# Altium PCB analog_multiplierV5.PcbDoc
Units mm, origin at the board's own origin, x right, y up, seen from the top; angles counter-clockwise.
Board outline 60 x 30 mm, 2 copper layers (F.Cu, B.Cu); 94 components, 84 nets, 256 pads, 22 vias.
Unrouted connection lines stored in the file: 32.
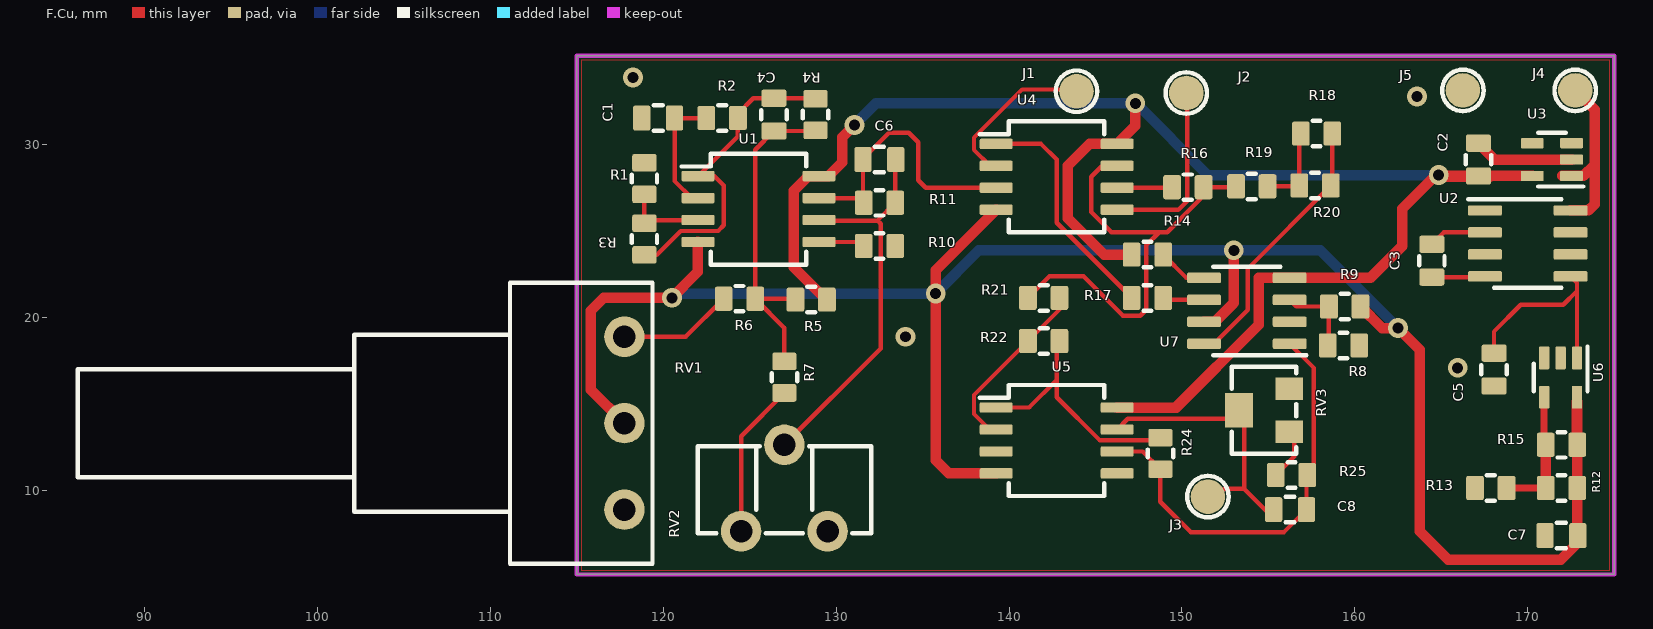
[diagram p0: F.Cu view]
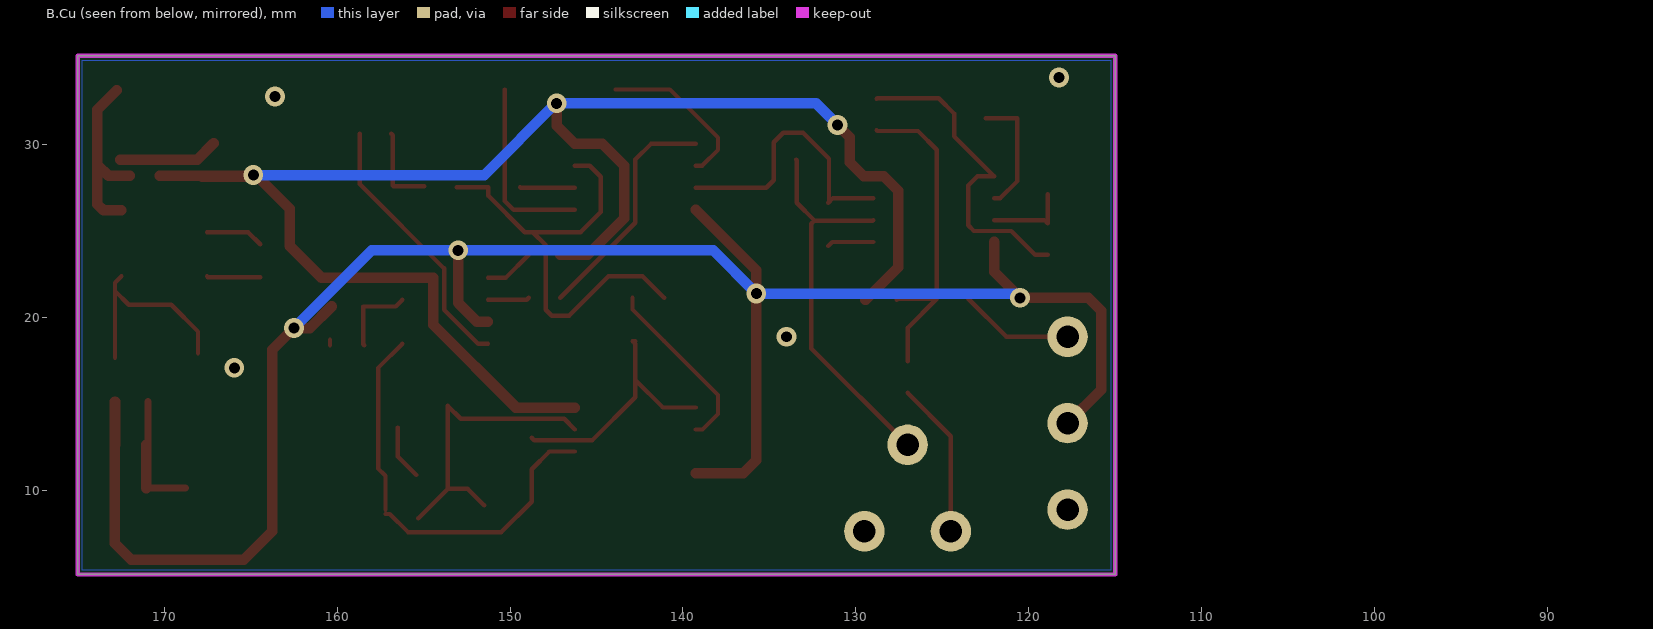
[diagram p1: B.Cu view, seen from below]

## Layer stack, top to bottom
F.Mask: solder mask 0.0102, Solder Resist, Dk 3.5
F.Cu: signal copper 0.0356
Dielectric 1: dielectric 0.32, FR-4, Dk 4.8
B.Cu: signal copper 0.0356
B.Mask: solder mask 0.0102, Solder Resist, Dk 3.5

## Board outline
175,5.15 115,5.15 115,35.15 175,35.15 175,5.15

## Design rules (kind name [scope] priority, off if disabled: settings)
Clearance "Clearence 0,5_Polygon" [InNamedPolygon('F.Cu-GND') OR InNamedPolygon('B.Cu-GND') OR InNamedPolygon('F.Cu-GND-1') OR InNamedPolygon('B.Cu-GND-1')] p1: gap=0.5 ignorepadtopadclearanceinfootprint=FALSE
MinimumSolderMaskSliver [All] p1: minsoldermaskwidth=0
PolygonConnect Polygon_B.Cu-GND-1_ConnectDirect [IsNamedPolygon('B.Cu-GND-1') vs IsVia] p1: connectstyle=Direct reliefconductorwidth=0.254 reliefentries=4 polygonreliefangle="90 Angle" airgapwidth=0.254
PolygonConnect Polygon_B.Cu-GND-1_ConnectRelief_2 [IsNamedPolygon('B.Cu-GND-1') vs (IsThruPin or IsSMTPin) and (PadShape_AllLayers = 'Round')] p2: connectstyle=Relief reliefconductorwidth=0.5 reliefentries=4 polygonreliefangle="45 Angle" airgapwidth=0.5
PolygonConnect Polygon_B.Cu-GND-1_ConnectRelief_1 [IsNamedPolygon('B.Cu-GND-1') vs (IsThruPin or IsSMTPin) and (PadShape_AllLayers <> 'Round')] p3: connectstyle=Relief reliefconductorwidth=0.5 reliefentries=4 polygonreliefangle="90 Angle" airgapwidth=0.5
PolygonConnect Polygon_F.Cu-GND-1_ConnectDirect_1 [IsNamedPolygon('F.Cu-GND-1') vs IsVia] p4: connectstyle=Direct reliefconductorwidth=0.254 reliefentries=4 polygonreliefangle="90 Angle" airgapwidth=0.254
PolygonConnect Polygon_F.Cu-GND-1_ConnectRelief_2 [IsNamedPolygon('F.Cu-GND-1') vs (IsThruPin or IsSMTPin) and (PadShape_AllLayers = 'Round')] p5: connectstyle=Relief reliefconductorwidth=0.5 reliefentries=4 polygonreliefangle="45 Angle" airgapwidth=0.5
PolygonConnect Polygon_F.Cu-GND-1_ConnectRelief_1 [IsNamedPolygon('F.Cu-GND-1') vs (IsThruPin or IsSMTPin) and (PadShape_AllLayers <> 'Round')] p6: connectstyle=Relief reliefconductorwidth=0.5 reliefentries=4 polygonreliefangle="90 Angle" airgapwidth=0.5
PolygonConnect Polygon_B.Cu-GND_ConnectDirect_1 [IsNamedPolygon('B.Cu-GND') vs IsVia] p7: connectstyle=Direct reliefconductorwidth=0.254 reliefentries=4 polygonreliefangle="90 Angle" airgapwidth=0.254
PolygonConnect Polygon_B.Cu-GND_ConnectRelief_2 [IsNamedPolygon('B.Cu-GND') vs (IsThruPin or IsSMTPin) and (PadShape_AllLayers = 'Round')] p8: connectstyle=Relief reliefconductorwidth=0.5 reliefentries=4 polygonreliefangle="45 Angle" airgapwidth=0.5
PolygonConnect Polygon_B.Cu-GND_ConnectRelief_1 [IsNamedPolygon('B.Cu-GND') vs (IsThruPin or IsSMTPin) and (PadShape_AllLayers <> 'Round')] p9: connectstyle=Relief reliefconductorwidth=0.5 reliefentries=4 polygonreliefangle="90 Angle" airgapwidth=0.5
PolygonConnect Polygon_F.Cu-GND_ConnectDirect_1 [IsNamedPolygon('F.Cu-GND') vs IsVia] p10: connectstyle=Direct reliefconductorwidth=0.254 reliefentries=4 polygonreliefangle="90 Angle" airgapwidth=0.254
PolygonConnect Polygon_F.Cu-GND_ConnectRelief_2 [IsNamedPolygon('F.Cu-GND') vs (IsThruPin or IsSMTPin) and (PadShape_AllLayers = 'Round')] p11: connectstyle=Relief reliefconductorwidth=0.5 reliefentries=4 polygonreliefangle="45 Angle" airgapwidth=0.5
PolygonConnect Polygon_F.Cu-GND_ConnectRelief_1 [IsNamedPolygon('F.Cu-GND') vs (IsThruPin or IsSMTPin) and (PadShape_AllLayers <> 'Round')] p12: connectstyle=Relief reliefconductorwidth=0.5 reliefentries=4 polygonreliefangle="90 Angle" airgapwidth=0.5
PolygonConnect Polygon_B.Cu-GND-1_ConnectRelief45 [IsNamedPolygon('B.Cu-GND-1') vs (IsThruPin or IsSMTPin) and (PadShape_AllLayers = 'Round')] p13: connectstyle=Relief reliefconductorwidth=0.5 reliefentries=4 polygonreliefangle="45 Angle" airgapwidth=0.5
PolygonConnect Polygon_B.Cu-GND-1_ConnectRelief90 [IsNamedPolygon('B.Cu-GND-1') vs (IsThruPin or IsSMTPin) and (PadShape_AllLayers <> 'Round')] p14: connectstyle=Relief reliefconductorwidth=0.5 reliefentries=4 polygonreliefangle="90 Angle" airgapwidth=0.5
PolygonConnect Polygon_F.Cu-GND-1_ConnectDirect [IsNamedPolygon('F.Cu-GND-1') vs IsVia] p15: connectstyle=Direct reliefconductorwidth=0.254 reliefentries=4 polygonreliefangle="90 Angle" airgapwidth=0.254
PolygonConnect Polygon_F.Cu-GND-1_ConnectRelief45 [IsNamedPolygon('F.Cu-GND-1') vs (IsThruPin or IsSMTPin) and (PadShape_AllLayers = 'Round')] p16: connectstyle=Relief reliefconductorwidth=0.5 reliefentries=4 polygonreliefangle="45 Angle" airgapwidth=0.5
PolygonConnect Polygon_F.Cu-GND-1_ConnectRelief90 [IsNamedPolygon('F.Cu-GND-1') vs (IsThruPin or IsSMTPin) and (PadShape_AllLayers <> 'Round')] p17: connectstyle=Relief reliefconductorwidth=0.5 reliefentries=4 polygonreliefangle="90 Angle" airgapwidth=0.5
PolygonConnect Polygon_B.Cu-GND_ConnectDirect [IsNamedPolygon('B.Cu-GND') vs IsVia] p18: connectstyle=Direct reliefconductorwidth=0.254 reliefentries=4 polygonreliefangle="90 Angle" airgapwidth=0.254
PolygonConnect Polygon_B.Cu-GND_ConnectRelief45 [IsNamedPolygon('B.Cu-GND') vs (IsThruPin or IsSMTPin) and (PadShape_AllLayers = 'Round')] p19: connectstyle=Relief reliefconductorwidth=0.5 reliefentries=4 polygonreliefangle="45 Angle" airgapwidth=0.5
PolygonConnect Polygon_B.Cu-GND_ConnectRelief90 [IsNamedPolygon('B.Cu-GND') vs (IsThruPin or IsSMTPin) and (PadShape_AllLayers <> 'Round')] p20: connectstyle=Relief reliefconductorwidth=0.5 reliefentries=4 polygonreliefangle="90 Angle" airgapwidth=0.5
PolygonConnect Polygon_F.Cu-GND_ConnectDirect [IsNamedPolygon('F.Cu-GND') vs IsVia] p21: connectstyle=Direct reliefconductorwidth=0.254 reliefentries=4 polygonreliefangle="90 Angle" airgapwidth=0.254
PolygonConnect Polygon_F.Cu-GND_ConnectRelief45 [IsNamedPolygon('F.Cu-GND') vs (IsThruPin or IsSMTPin) and (PadShape_AllLayers = 'Round')] p22: connectstyle=Relief reliefconductorwidth=0.5 reliefentries=4 polygonreliefangle="45 Angle" airgapwidth=0.5
PolygonConnect Polygon_F.Cu-GND_ConnectRelief90 [IsNamedPolygon('F.Cu-GND') vs (IsThruPin or IsSMTPin) and (PadShape_AllLayers <> 'Round')] p23: connectstyle=Relief reliefconductorwidth=0.5 reliefentries=4 polygonreliefangle="90 Angle" airgapwidth=0.5
RoutingVias [All] p1: holewidth=0.711 width=1.27 viastyle="Through Hole" minholewidth=0.711 minwidth=1.27 maxholewidth=0.711 maxwidth=1.27
SilkToSilkClearance [All] p1: silktosilkclearance=0
SilkToSolderMaskClearance [IsPad] p1: minsilkscreentomaskgap=0 clearancetoexposedcopper=TRUE
SolderMaskExpansion [All] p1: expansion=0.102 istentingtop=FALSE
Width [All] p1: maxlimit=10 minlimit=0.254 preferedwidth=0.254 minimp=50.000000 maximp=50.000000 favimp=50.000000
26 further rules are at their usual default settings.

## Components (designator, comment, footprint, x,y, rotation, side; value= is the part's Value field where it differs from the comment)
C1 "10n" C_0805_2012Metric 119.7,31.55 r180 top
C1 "10n" C_0805_2012Metric 119.7,31.55 r180 top
C2 "100u" C_0805_2012Metric 167.15,29.15 r90 top
C2 "100u" C_0805_2012Metric 167.15,29.15 r90 top
C3 "10u" C_0805_2012Metric 164.45,23.3 r270 top
C3 "10u" C_0805_2012Metric 164.45,23.3 r270 top
C4 "100n" C_0805_2012Metric 126.4,31.75 r270 top
C4 "100n" C_0805_2012Metric 126.4,31.75 r270 top
C5 "2.2u" C_0805_2012Metric 168.05,17 r270 top
C5 "2.2u" C_0805_2012Metric 168.05,17 r270 top
C6 "10n" C_0805_2012Metric 132.5,29.15 r180 top
C6 "10n" C_0805_2012Metric 132.5,29.15 r180 top
C7 "2.2u" C_0805_2012Metric 171.95,7.4 r180 top
C7 "2.2u" C_0805_2012Metric 171.95,7.4 r180 top
C8 "470n" C_0805_2012Metric 156.25,8.9 r180 top
C8 "470n" C_0805_2012Metric 156.25,8.9 r180 top
J1 "in_x" TestPoint_Pad_D2.0mm 143.9,33.1 r0 top
J1 "in_x" TestPoint_Pad_D2.0mm 143.9,33.1 r0 top
J2 "in_y" TestPoint_Pad_D2.0mm 150.25,33 r0 top
J2 "in_y" TestPoint_Pad_D2.0mm 150.25,33 r0 top
J3 "out" TestPoint_Pad_D2.0mm 151.5,9.65 r0 top
J3 "out" TestPoint_Pad_D2.0mm 151.5,9.65 r0 top
J4 "batt+" TestPoint_Pad_D2.0mm 172.75,33.15 r0 top
J4 "batt+" TestPoint_Pad_D2.0mm 172.75,33.15 r0 top
J5 "gnd" TestPoint_Pad_D2.0mm 166.25,33.15 r0 top
J5 "gnd" TestPoint_Pad_D2.0mm 166.25,33.15 r0 top
R1 "100k" R_0805_2012Metric 118.9,28.05 r90 top
R1 "100k" R_0805_2012Metric 118.9,28.05 r90 top
R2 "4,7k" R_0805_2012Metric 123.4,31.55 r0 top
R2 "4,7k" R_0805_2012Metric 123.4,31.55 r0 top
R3 "100k" R_0805_2012Metric 118.9,24.55 r270 top
R3 "100k" R_0805_2012Metric 118.9,24.55 r270 top
R4 "0" R_0805_2012Metric 128.8,31.75 r270 top
R4 "0" R_0805_2012Metric 128.8,31.75 r270 top
R5 "68k" R_0805_2012Metric 128.55,21.05 r0 top
R5 "68k" R_0805_2012Metric 128.55,21.05 r0 top
R6 "56k" R_0805_2012Metric 124.4,21.1 r180 top
R6 "56k" R_0805_2012Metric 124.4,21.1 r180 top
R7 "2.2k" R_0805_2012Metric 127,16.562 r270 top
R7 "2.2k" R_0805_2012Metric 127,16.562 r270 top
R8 "0" R_0805_2012Metric 159.337,18.4 r180 top
R8 "0" R_0805_2012Metric 159.337,18.4 r180 top
R9 "0" R_0805_2012Metric 159.413,20.65 r0 top
R9 "0" R_0805_2012Metric 159.413,20.65 r0 top
R10 "10k" R_0805_2012Metric 132.5,24.15 r180 top
R10 "10k" R_0805_2012Metric 132.5,24.15 r180 top
R11 "10k" R_0805_2012Metric 132.5,26.65 r180 top
R11 "10k" R_0805_2012Metric 132.5,26.65 r180 top
R12 "120k" R_0805_2012Metric 171.95,10.15 r180 top
R12 "120k" R_0805_2012Metric 171.95,10.15 r180 top
R13 "33k" R_0805_2012Metric 167.862,10.15 r180 top
R13 "33k" R_0805_2012Metric 167.862,10.15 r180 top
R14 "0" R_0805_2012Metric 148,23.65 r0 top
R14 "0" R_0805_2012Metric 148,23.65 r0 top
R15 "120k" R_0805_2012Metric 171.95,12.65 r180 top
R15 "120k" R_0805_2012Metric 171.95,12.65 r180 top
R16 "10k" R_0805_2012Metric 150.337,27.55 r0 top
R16 "10k" R_0805_2012Metric 150.337,27.55 r0 top
R17 "470" R_0805_2012Metric 148,21.15 r0 top
R17 "470" R_0805_2012Metric 148,21.15 r0 top
R18 "4.7k" R_0805_2012Metric 157.788,30.65 r180 top
R18 "4.7k" R_0805_2012Metric 157.788,30.65 r180 top
R19 "0" R_0805_2012Metric 154.037,27.6 r0 top
R19 "0" R_0805_2012Metric 154.037,27.6 r0 top
R20 "4.7k" R_0805_2012Metric 157.7,27.65 r180 top
R20 "4.7k" R_0805_2012Metric 157.7,27.65 r180 top
R21 "4.7k" R_0805_2012Metric 142,21.15 r0 top
R21 "4.7k" R_0805_2012Metric 142,21.15 r0 top
R22 "4.7k" R_0805_2012Metric 142,18.65 r0 top
R22 "4.7k" R_0805_2012Metric 142,18.65 r0 top
R24 "4.7k" R_0805_2012Metric 148.75,12.15 r90 top
R24 "4.7k" R_0805_2012Metric 148.75,12.15 r90 top
R25 "680" R_0805_2012Metric 156.338,10.9 r180 top
R25 "680" R_0805_2012Metric 156.338,10.9 r180 top
RV1 "20k_pot" Potentiometer_Piher_PC-16_Single_Horizontal#1 117.75,18.9 r180 top
RV1 "20k_pot" Potentiometer_Piher_PC-16_Single_Horizontal#2 117.75,18.9 r180 top
RV2 "2k_pot" Potentiometer_ACP_CA9-H5_Horizontal#1 124.5,7.65 r90 top
RV2 "2k_pot" Potentiometer_ACP_CA9-H5_Horizontal#2 124.5,7.65 r90 top
RV3 "2k_pot" Potentiometer_Bourns_3224W_Vertical 154.75,14.65 r270 top
RV3 "2k_pot" Potentiometer_Bourns_3224W_Vertical 154.75,14.65 r270 top
U1 "TS922" SO-8_5.3x6.2mm_P1.27mm 125.5,26.285 r0 top
U1 "TS922" SO-8_5.3x6.2mm_P1.27mm 125.5,26.285 r0 top
U2 "LMC7660" SOIC-8_3.9x4.9mm_P1.27mm 170,24.3 r0 top
U2 "LMC7660" SOIC-8_3.9x4.9mm_P1.27mm 170,24.3 r0 top
U3 "SPX3819M5-L-3-3" SOT-23-5 171.4,29.15 r180 top
U3 "SPX3819M5-L-3-3" SOT-23-5 171.4,29.15 r180 top
U4 "TS922" SO-8_5.3x6.2mm_P1.27mm 142.75,28.15 r0 top
U4 "TS922" SO-8_5.3x6.2mm_P1.27mm 142.75,28.15 r0 top
U5 "TS922" SO-8_5.3x6.2mm_P1.27mm 142.75,12.9 r0 top
U5 "TS922" SO-8_5.3x6.2mm_P1.27mm 142.75,12.9 r0 top
U6 "TPS72301DBVR" SOT-23-5 171.9,16.537 r270 top
U6 "TPS72301DBVR" SOT-23-5 171.9,16.537 r270 top
U7 "DG419" SOIC-8_3.9x4.9mm_P1.27mm 153.75,20.4 r180 top
U7 "DG419" SOIC-8_3.9x4.9mm_P1.27mm 153.75,20.4 r180 top

## Footprints (in the part's own frame and the unit in brackets; to place one, negate y for a bottom-side part, rotate by r counter-clockwise, add the part's x,y. Pads: shape width x height; smd on the part's side, far side on the other; paste and mask are expansions set on the pad)
C_0805_2012Metric [mm]
  rrect25% 1x1.45 smd mask+0: 1(-0.95,0) 2(0.95,0)
  silkscreen extent -0.26,-0.73 0.26,0.73
Potentiometer_ACP_CA9-H5_Horizontal#1 [mm]
  round 2.34 hole 1.3 paste-2.34 mask+0: 1(0,0) 2(5,-2.5) 3(0,-5)
  silkscreen extent -0.12,-7.52 4.92,2.52
Potentiometer_ACP_CA9-H5_Horizontal#2 [mm]
  round 2.34 hole 1.3 paste-2539.97 mask+0: 1(0,0) 2(5,-2.5) 3(0,-5)
  silkscreen extent -0.12,-7.52 4.92,2.52
Potentiometer_Bourns_3224W_Vertical [mm]
  rect 1.3x1.6 smd mask+0: 1(1.25,1.45) 3(-1.25,1.45)
  rect 2x1.6 smd mask+0: 2(0,-1.45)
  silkscreen extent -2.52,-1.87 2.52,1.87
Potentiometer_Piher_PC-16_Single_Horizontal#1 [mm]
  round 2.34 hole 1.3 paste-2.34 mask+0: 1(0,0) 2(0,5) 3(0,10)
  silkscreen extent -1.62,-3.12 31.62,13.12
Potentiometer_Piher_PC-16_Single_Horizontal#2 [mm]
  round 2.34 hole 1.3 paste-2539.97 mask+0: 1(0,0) 2(0,5) 3(0,10)
  silkscreen extent -1.62,-3.12 31.62,13.12
R_0805_2012Metric [mm]
  rrect24% 1.025x1.4 smd mask+0: 1(-0.913,0) 2(0.913,0)
  silkscreen extent -0.23,-0.73 0.23,0.73
SO-8_5.3x6.2mm_P1.27mm [mm]
  rrect25% 1.9x0.6 smd mask+0: 1(-3.5,1.905) 2(-3.5,0.635) 3(-3.5,-0.635) 4(-3.5,-1.905) 5(3.5,-1.905) 6(3.5,-0.635) 7(3.5,0.635) 8(3.5,1.905)
  silkscreen extent -4.45,-3.21 2.76,3.21
SOIC-8_3.9x4.9mm_P1.27mm [mm]
  rrect25% 1.95x0.6 smd mask+0: 1(-2.475,1.905) 2(-2.475,0.635) 3(-2.475,-0.635) 4(-2.475,-1.905) 5(2.475,-1.905) 6(2.475,-0.635) 7(2.475,0.635) 8(2.475,1.905)
  silkscreen extent -3.45,-2.56 1.95,2.56
SOT-23-5 [mm]
  rrect25% 1.325x0.6 smd mask+0: 1(-1.138,0.95) 2(-1.138,0) 3(-1.138,-0.95) 4(1.138,-0.95) 5(1.138,0.95)
  silkscreen extent -1.8,-1.56 0.8,1.56
TestPoint_Pad_D2.0mm [mm]
  round 2 smd paste-2 mask+0: 1(0,0)
  silkscreen extent -1.2,-1.2 1.2,1.2

## Part data
C1 C1 C2 C2 C3 C3 C4 C4 C5 C5 C6 C6 C7 C7 C8 C8: library part C_0805_2012Metric, "Capacitor SMD 0805 (2012 Metric), square (rectangular) end terminal, IPC_7351 nominal, (Body size source: IPC-SM-782 page 76, https://www.pcb-3d.com/wordpress/wp-content/uploads/ipc-sm-782a_amendment_1_and_2.pdf, https://docs.google.com/spreadsheets/d/1BsfQQcO9C6DZCsRaXUlFlo91Tg2WpOkGARC1WS5S8t0/edit?usp=sharing), generated with kicad-footprint-generator", Sheetfile=analog_multiplierV5.kicad_sch, ki_description="Unpolarized capacitor", ki_keywords="cap capacitor"
J1 J1 J2 J2 J3 J3 J4 J4 J5 J5: library part TestPoint_Pad_D2.0mm, "SMD pad as test Point, diameter 2.0mm", Sheetfile=analog_multiplierV5.kicad_sch, ki_description="Generic connector, single row, 01x01, script generated", ki_keywords=connector
R1 R1 R2 R2 R3 R3 R4 R4 R5 R5 R6 R6 R7 R7 R8 R8 R9 R9 R10 R10 R11 R11 R12 R12 R13 R13 R14 R14 R15 R15 R16 R16 R17 R17 R18 R18 R19 R19 R20 R20 R21 R21 R22 R22 R24 R24 R25 R25: library part R_0805_2012Metric, "Resistor SMD 0805 (2012 Metric), square (rectangular) end terminal, IPC_7351 nominal, (Body size source: IPC-SM-782 page 72, https://www.pcb-3d.com/wordpress/wp-content/uploads/ipc-sm-782a_amendment_1_and_2.pdf), generated with kicad-footprint-generator", Sheetfile=analog_multiplierV5.kicad_sch, ki_description=Resistor, ki_keywords="R res resistor"
RV1 RV1: library part Potentiometer_Piher_PC-16_Single_Horizontal, "Potentiometer, horizontal, Piher PC-16 Single, http://www.piher-nacesa.com/pdf/20-PC16v03.pdf", Sheetfile=analog_multiplierV5.kicad_sch, ki_description=Potentiometer, ki_keywords="resistor variable"
RV2 RV2: library part Potentiometer_ACP_CA9-H5_Horizontal, "Potentiometer, horizontal, ACP CA9-H5, http://www.acptechnologies.com/wp-content/uploads/2017/05/02-ACP-CA9-CE9.pdf", Sheetfile=analog_multiplierV5.kicad_sch, ki_description=Potentiometer, ki_keywords="resistor variable"
RV3 RV3: library part Potentiometer_Bourns_3224W_Vertical, "Potentiometer, vertical, Bourns 3224W, https://www.bourns.com/docs/Product-Datasheets/3224.pdf", Sheetfile=analog_multiplierV5.kicad_sch, ki_description=Potentiometer, ki_keywords="resistor variable"
U1 U1 U4 U4 U5 U5: library part SO-8_5.3x6.2mm_P1.27mm, "SO, 8 Pin (https://www.ti.com/lit/ml/msop001a/msop001a.pdf), generated with kicad-footprint-generator ipc_gullwing_generator.py", Sheetfile=analog_multiplierV5.kicad_sch, ki_description="Dual operational amplifier", ki_keywords="dual opamp"
U2 U2 U7 U7: library part SOIC-8_3.9x4.9mm_P1.27mm, "SOIC, 8 Pin (JEDEC MS-012AA, https://www.analog.com/media/en/package-pcb-resources/package/pkg_pdf/soic_narrow-r/r_8.pdf), generated with kicad-footprint-generator ipc_gullwing_generator.py", Sheetfile=analog_multiplierV5.kicad_sch
  U2 U2: ki_description="Voltage converter from +1.5V to +10V to +1.5V to +10V, SO-8/DIP-8", ki_keywords="Voltage converter"
  U7 U7: ki_description="Single SPDT 3V Logic Compatible CMOS Analog Switch, 35Ohm Ron, with Vlogic, SOIC-8", ki_keywords="CMOS Analog Switch"
U3 U3 U6 U6: library part SOT-23-5, "SOT, 5 Pin (https://www.jedec.org/sites/default/files/docs/Mo-178c.PDF variant AA), generated with kicad-footprint-generator ipc_gullwing_generator.py", Sheetfile=analog_multiplierV5.kicad_sch
  U3 U3: ki_description="500mA Low drop-out regulator, Fixed Output 3.3V, SOT-23-5", ki_keywords="REGULATOR LDO 3.3V"
  U6 U6: ki_description="Low input voltage 50mA LDO variable output voltage, SOT-23-5", ki_keywords="linear low dropout Regulator adjustable"

## Via types
v1: diameter 1.143, hole 0.635, F.Cu to B.Cu, tented both sides, 22 vias

## Nets (pads, with @x,y where several pads share a name; then routed paths per layer and width w, separated by ;. In a path a pad name is that pad's centre, name@x,y a point inside that pad or via, vN(x,y) a via of type N, cw(c..) or ccw(c..) an arc to the next point about the centre after c; other vN are vias at no path point)
+3.3V: C2.1@167.15,28.2 R5.2@129.462,21.05 R14.1@147.088,23.65 U1.8@129,28.19 U3.5@170.262,28.2 U4.8@146.25,30.055 U5.8@146.25,14.805 U7.4@156.225,22.305 | length 98.5
  F.Cu w0.61: R5.2@129.462,21.05 129.422,21.05 127.542,22.93 127.542,27.343 128.389,28.19 129,28.19 129.54,28.19 130.35,29 130.35,30.45 v1(131.05,31.15) ; U5.8@146.25,14.805 149.655,14.805 154.451,19.601 154.451,22.305 156.225,22.305 160.905,22.305 162.75,24.15 162.75,26.3 v1@164.6,28.15 ; R14.1@147.088,23.65 145.5,23.65 143.385,25.765 143.385,28.785 144.655,30.055 146.25,30.055 147.3,31.105 v1(147.3,32.4) ; C2.1@167.8,28.15 v1@164.6,28.15 ; U3.5@170.262,28.2 167.15,28.2 164.9,28.2 v1(164.85,28.25) 164.8,28.2 164.65,28.2 v1@164.6,28.15
  B.Cu w0.61: v1(131.05,31.15) 132.3,32.4 v1(147.3,32.4) 147.35,32.4 151.5,28.25 v1(164.85,28.25)
+3.3V: C2.1@167.15,28.2 R5.2@129.462,21.05 R14.1@147.088,23.65 U1.8@129,28.19 U3.5@170.262,28.2 U4.8@146.25,30.055 U5.8@146.25,14.805 U7.4@156.225,22.305 | length 98.5
  F.Cu w0.61: R5.2@129.462,21.05 129.422,21.05 127.542,22.93 127.542,27.343 128.389,28.19 129,28.19 129.54,28.19 130.35,29 130.35,30.45 v1(131.05,31.15) ; U5.8@146.25,14.805 149.655,14.805 154.451,19.601 154.451,22.305 156.225,22.305 160.905,22.305 162.75,24.15 162.75,26.3 v1@164.6,28.15 ; R14.1@147.088,23.65 145.5,23.65 143.385,25.765 143.385,28.785 144.655,30.055 146.25,30.055 147.3,31.105 v1(147.3,32.4) ; C2.1@167.8,28.15 v1@164.6,28.15 ; U3.5@170.262,28.2 167.15,28.2 164.9,28.2 v1(164.85,28.25) 164.8,28.2 164.65,28.2 v1@164.6,28.15
  B.Cu w0.61: v1(131.05,31.15) 132.3,32.4 v1(147.3,32.4) 147.35,32.4 151.5,28.25 v1(164.85,28.25)
+BATT: J4.1@172.75,33.15 U2.8@172.475,26.205 U3.1@172.538,28.2 | length 10.7
  F.Cu w0.61: U3.1@171.987,28.2 173.22,28.2 173.871,28.85 ; U2.8@172.475,26.205 173.505,26.205 173.871,26.57 173.871,28.85 ; J4.1@172.75,33.15 173.871,32.029 173.871,28.85
+BATT: J4.1@172.75,33.15 U2.8@172.475,26.205 U3.1@172.538,28.2 | length 10.7
  F.Cu w0.61: U3.1@171.987,28.2 173.22,28.2 173.871,28.85 ; U2.8@172.475,26.205 173.505,26.205 173.871,26.57 173.871,28.85 ; J4.1@172.75,33.15 173.871,32.029 173.871,28.85
-3V3: C7.1@172.9,7.4 R9.2@160.325,20.65 R12.1@172.862,10.15 R15.1@172.862,12.65 RV1.2@117.75,13.9 U1.4@122,24.38 U4.4@139.25,26.245 U5.4@139.25,10.995 U6.5@172.85,15.4 U7.7@151.275,19.765 | length 119.5
  F.Cu w0.61: RV1.2@117.75,13.9 115.805,15.845 115.805,20.4 116.555,21.15 v1(120.5,21.15) 122,22.65 U1.4@122,24.38 ; U5.4@139.25,10.995 136.505,10.995 135.75,11.75 v1(135.75,21.4) 135.75,22.745 U4.4@139.25,26.245 ; U7.7@151.275,19.765 151.911,19.765 153,20.854 v1(153,23.9) ; R9.2@160.325,20.65 161.575,19.4 v1(162.5,19.4) 163.75,18.15 163.75,7.65 165.4,6 171.9,6 172.862,6.962 172.862,10.15 172.862,12.65 172.85,12.662 U6.5@172.85,15.15
  B.Cu w0.61: v1(120.5,21.15) 120.75,21.4 v1(135.75,21.4) 138.25,23.9 v1(153,23.9) 158,23.9 v1(162.5,19.4)
-3V3: C7.1@172.9,7.4 R9.2@160.325,20.65 R12.1@172.862,10.15 R15.1@172.862,12.65 RV1.2@117.75,13.9 U1.4@122,24.38 U4.4@139.25,26.245 U5.4@139.25,10.995 U6.5@172.85,15.4 U7.7@151.275,19.765 | length 119.5
  F.Cu w0.61: RV1.2@117.75,13.9 115.805,15.845 115.805,20.4 116.555,21.15 v1(120.5,21.15) 122,22.65 U1.4@122,24.38 ; U5.4@139.25,10.995 136.505,10.995 135.75,11.75 v1(135.75,21.4) 135.75,22.745 U4.4@139.25,26.245 ; U7.7@151.275,19.765 151.911,19.765 153,20.854 v1(153,23.9) ; R9.2@160.325,20.65 161.575,19.4 v1(162.5,19.4) 163.75,18.15 163.75,7.65 165.4,6 171.9,6 172.862,6.962 172.862,10.15 172.862,12.65 172.85,12.662 U6.5@172.85,15.15
  B.Cu w0.61: v1(120.5,21.15) 120.75,21.4 v1(135.75,21.4) 138.25,23.9 v1(153,23.9) 158,23.9 v1(162.5,19.4)
GND: C1.2@118.75,31.55 C2.2@167.15,30.1 C5.2@168.05,16.05 C7.2@171,7.4 J5.1@166.25,33.15 R1.2@118.9,28.962 R8.1@160.25,18.4 R10.1@133.412,24.15 R13.2@166.95,10.15 U2.3@167.525,23.665 U3.2@172.538,29.15 U5.3@139.25,12.265 U5.5@146.25,10.995 U6.2@171.9,17.675 | length 6.1
  F.Cu w0.254: R8.1@160.413,18.4 R8.1@160.413,18.737
  F.Cu w0.61: C2.2@167.15,30.1 168.1,29.15 U3.2@172.538,29.15
  other v1: 165.95,17.1 134,18.9 163.6,32.8 118.25,33.9
GND: C1.2@118.75,31.55 C2.2@167.15,30.1 C5.2@168.05,16.05 C7.2@171,7.4 J5.1@166.25,33.15 R1.2@118.9,28.962 R8.1@160.25,18.4 R10.1@133.412,24.15 R13.2@166.95,10.15 U2.3@167.525,23.665 U3.2@172.538,29.15 U5.3@139.25,12.265 U5.5@146.25,10.995 U6.2@171.9,17.675 | length 6.1
  F.Cu w0.254: R8.1@160.413,18.4 R8.1@160.413,18.737
  F.Cu w0.61: C2.2@167.15,30.1 168.1,29.15 U3.2@172.538,29.15
  other v1: 165.95,17.1 134,18.9 163.6,32.8 118.25,33.9
Net-(C4-Pad1): C4.1@126.4,32.7 R2.2@124.312,31.55 R3.2@118.9,23.637 R4.1@128.8,32.663 U1.1@122,28.19 | length 19.6
  F.Cu w0.254: R3.2@118.9,23.637 119.628,23.637 121.006,25.015 123.165,25.015 123.5,25.35 123.5,27.65 122.96,28.19 U1.1@122,28.19 ; U1.1@122.79,28.19 U1.1@122,28.19 ; R4.1@128.8,32.663 128.763,32.7 126.4,32.7 125.2,32.7 124.312,31.812 124.312,31.55 124.312,30.502 U1.1@122,28.19
Net-(C4-Pad1): C4.1@126.4,32.7 R2.2@124.312,31.55 R3.2@118.9,23.637 R4.1@128.8,32.663 U1.1@122,28.19 | length 19.6
  F.Cu w0.254: R3.2@118.9,23.637 119.628,23.637 121.006,25.015 123.165,25.015 123.5,25.35 123.5,27.65 122.96,28.19 U1.1@122,28.19 ; U1.1@122.79,28.19 U1.1@122,28.19 ; R4.1@128.8,32.663 128.763,32.7 126.4,32.7 125.2,32.7 124.312,31.812 124.312,31.55 124.312,30.502 U1.1@122,28.19
Net-(C4-Pad2): C4.2@126.4,30.8 R4.2@128.8,30.837 R5.1@127.637,21.05 R6.1@125.313,21.1 R7.1@127,17.475 | length 19.2
  F.Cu w0.254: R7.1@127,17.475 127,19.412 R6.1@125.313,21.1 ; R5.1@127.637,21.05 127.587,21.1 R6.1@125.313,21.1 ; R4.2@128.8,30.837 128.763,30.8 126.4,30.8 125.313,29.712 R6.1@125.313,21.1
Net-(C4-Pad2): C4.2@126.4,30.8 R4.2@128.8,30.837 R5.1@127.637,21.05 R6.1@125.313,21.1 R7.1@127,17.475 | length 19.2
  F.Cu w0.254: R7.1@127,17.475 127,19.412 R6.1@125.313,21.1 ; R5.1@127.637,21.05 127.587,21.1 R6.1@125.313,21.1 ; R4.2@128.8,30.837 128.763,30.8 126.4,30.8 125.313,29.712 R6.1@125.313,21.1
Net-(R6-Pad2): R6.2@123.488,21.1 RV1.1@117.75,18.9 | length 6.6
  F.Cu w0.254: RV1.1@117.75,18.9 121.287,18.9 R6.2@123.488,21.1
Net-(R6-Pad2): R6.2@123.488,21.1 RV1.1@117.75,18.9 | length 6.6
  F.Cu w0.254: RV1.1@117.75,18.9 121.287,18.9 R6.2@123.488,21.1
Net-(R7-Pad2): R7.2@127,15.65 RV2.1@124.5,7.65 | length 9
  F.Cu w0.254: RV2.1@124.5,7.65 124.5,13.15 R7.2@127,15.65
Net-(R7-Pad2): R7.2@127,15.65 RV2.1@124.5,7.65 | length 9
  F.Cu w0.254: RV2.1@124.5,7.65 124.5,13.15 R7.2@127,15.65
Net-(R16-Pad2): R16.2@151.25,27.55 R19.1@153.125,27.6 R21.1@141.088,21.15 U4.7@146.25,28.785 | length 27.2
  F.Cu w0.254: R21.1@141.088,21.15 142.338,22.4 144.304,22.4 146.585,20.12 147.59,20.12 147.93,20.46 147.93,24.201 148.679,24.95 ; U4.7@146.25,28.785 145.385,28.785 144.75,28.15 144.75,26.116 145.916,24.95 148.679,24.95 ; R19.1@153.075,27.55 151.25,27.55 151.25,27.053 149.147,24.95 148.679,24.95
Net-(R16-Pad2): R16.2@151.25,27.55 R19.1@153.125,27.6 R21.1@141.088,21.15 U4.7@146.25,28.785 | length 27.2
  F.Cu w0.254: R21.1@141.088,21.15 142.338,22.4 144.304,22.4 146.585,20.12 147.59,20.12 147.93,20.46 147.93,24.201 148.679,24.95 ; U4.7@146.25,28.785 145.385,28.785 144.75,28.15 144.75,26.116 145.916,24.95 148.679,24.95 ; R19.1@153.075,27.55 151.25,27.55 151.25,27.053 149.147,24.95 148.679,24.95
Net-(R17-Pad1): R17.1@147.088,21.15 U4.1@139.25,30.055 | length 13.7
  F.Cu w0.254: U4.1@139.25,30.055 141.845,30.055 142.75,29.15 142.75,25.487 R17.1@147.088,21.15
Net-(R17-Pad1): R17.1@147.088,21.15 U4.1@139.25,30.055 | length 13.7
  F.Cu w0.254: U4.1@139.25,30.055 141.845,30.055 142.75,29.15 142.75,25.487 R17.1@147.088,21.15
Net-(R17-Pad2): R17.2@148.913,21.15 U7.6@151.275,21.035 | length 2.4
  F.Cu w0.254: R17.2@148.913,21.15 149.027,21.035 U7.6@151.275,21.035
Net-(R17-Pad2): R17.2@148.913,21.15 U7.6@151.275,21.035 | length 2.4
  F.Cu w0.254: R17.2@148.913,21.15 149.027,21.035 U7.6@151.275,21.035
Net-(R18-Pad1): R18.1@158.7,30.65 R20.1@158.612,27.65 U7.8@151.275,18.495 | length 15.6
  F.Cu w0.254: U7.8@151.275,18.495 151.845,18.495 153.816,20.466 153.816,22.853 158.612,27.65 158.7,27.737 R18.1@158.7,30.65
Net-(R18-Pad1): R18.1@158.7,30.65 R20.1@158.612,27.65 U7.8@151.275,18.495 | length 15.6
  F.Cu w0.254: U7.8@151.275,18.495 151.845,18.495 153.816,20.466 153.816,22.853 158.612,27.65 158.7,27.737 R18.1@158.7,30.65
Net-(R18-Pad2): R18.2@156.875,30.65 R19.2@154.95,27.6 R20.2@156.787,27.65 | length 4.9
  F.Cu w0.254: R19.2@154.95,27.6 156.737,27.6 156.787,27.65 156.787,30.562 R18.2@156.875,30.65
Net-(R18-Pad2): R18.2@156.875,30.65 R19.2@154.95,27.6 R20.2@156.787,27.65 | length 4.9
  F.Cu w0.254: R19.2@154.95,27.6 156.737,27.6 156.787,27.65 156.787,30.562 R18.2@156.875,30.65
Net-(R22-Pad2): R22.2@142.913,18.65 R24.2@148.75,13.062 U5.1@139.25,14.805 | length 14.7
  F.Cu w0.254: U5.1@139.25,14.805 141.155,14.805 142.75,16.4 ; R22.2@142.75,18.65 142.913,18.65 142.75,18.487 142.75,16.4 ; R24.2@148.75,13.062 148.592,12.905 145.251,12.905 142.75,15.406 142.75,15.9 142.75,16.4
Net-(R22-Pad2): R22.2@142.913,18.65 R24.2@148.75,13.062 U5.1@139.25,14.805 | length 14.7
  F.Cu w0.254: U5.1@139.25,14.805 141.155,14.805 142.75,16.4 ; R22.2@142.75,18.65 142.913,18.65 142.75,18.487 142.75,16.4 ; R24.2@148.75,13.062 148.592,12.905 145.251,12.905 142.75,15.406 142.75,15.9 142.75,16.4
Net-(R25-Pad2): R25.2@155.425,10.9 RV3.1@156.2,13.4 | length 3.2
  F.Cu w0.254: R25.2@155.425,10.9 156.5,11.975 RV3.1@156.5,13.65
Net-(R25-Pad2): R25.2@155.425,10.9 RV3.1@156.2,13.4 | length 3.2
  F.Cu w0.254: R25.2@155.425,10.9 156.5,11.975 RV3.1@156.5,13.65
Net-(U1A-+): R1.1@118.9,27.137 R3.1@118.9,25.462 U1.3@122,25.65 | length 4.9
  F.Cu w0.254: R1.1@118.9,27.137 118.9,25.462 119.088,25.65 U1.3@122,25.65
Net-(U1A-+): R1.1@118.9,27.137 R3.1@118.9,25.462 U1.3@122,25.65 | length 4.9
  F.Cu w0.254: R1.1@118.9,27.137 118.9,25.462 119.088,25.65 U1.3@122,25.65
Net-(U1A--): C1.1@120.65,31.55 R2.1@122.487,31.55 U1.2@122,26.92 | length 7.2
  F.Cu w0.254: U1.2@122,26.92 121.641,26.92 120.65,27.911 120.65,31.55 R2.1@122.487,31.55
Net-(U1A--): C1.1@120.65,31.55 R2.1@122.487,31.55 U1.2@122,26.92 | length 7.2
  F.Cu w0.254: U1.2@122,26.92 121.641,26.92 120.65,27.911 120.65,31.55 R2.1@122.487,31.55
Net-(U1B-+): R10.2@131.587,24.15 U1.5@129,24.38 | length 2.7
  F.Cu w0.254: U1.5@129,24.38 131.357,24.38 R10.2@131.587,24.15
Net-(U1B-+): R10.2@131.587,24.15 U1.5@129,24.38 | length 2.7
  F.Cu w0.254: U1.5@129,24.38 131.357,24.38 R10.2@131.587,24.15
Net-(U1B--): C6.1@133.45,29.15 R11.1@133.412,26.65 RV2.2@127,12.65 U1.6@129,25.65 | length 22.7
  F.Cu w0.254: RV2.2@127,12.65 132.57,18.22 132.57,25.432 132.382,25.62 ; U1.6@129,25.65 129.03,25.62 132.382,25.62 ; C6.1@133.45,29.15 133.412,29.112 133.412,26.65 132.382,25.62
Net-(U1B--): C6.1@133.45,29.15 R11.1@133.412,26.65 RV2.2@127,12.65 U1.6@129,25.65 | length 22.7
  F.Cu w0.254: RV2.2@127,12.65 132.57,18.22 132.57,25.432 132.382,25.62 ; U1.6@129,25.65 129.03,25.62 132.382,25.62 ; C6.1@133.45,29.15 133.412,29.112 133.412,26.65 132.382,25.62
Net-(U2-CAP+): C3.1@164.45,24.25 U2.2@167.525,24.935 | length 3.4
  F.Cu w0.254: C3.1@164.45,24.25 165.135,24.935 U2.2@167.525,24.935
Net-(U2-CAP+): C3.1@164.45,24.25 U2.2@167.525,24.935 | length 3.4
  F.Cu w0.254: C3.1@164.45,24.25 165.135,24.935 U2.2@167.525,24.935
Net-(U2-CAP-): C3.2@164.45,22.35 U2.4@167.525,22.395 | length 3.1
  F.Cu w0.254: C3.2@164.45,22.35 167.48,22.35 U2.4@167.525,22.395
Net-(U2-CAP-): C3.2@164.45,22.35 U2.4@167.525,22.395 | length 3.1
  F.Cu w0.254: C3.2@164.45,22.35 167.48,22.35 U2.4@167.525,22.395
Net-(U2-VOUT): C5.1@168.05,17.95 U2.5@172.475,22.395 U6.1@172.85,17.675 | length 11.9
  F.Cu w0.254: C5.1@168.05,17.95 168.05,19.2 169.6,20.75 172.05,20.75 172.85,21.55 ; U2.5@172.475,22.395 172.85,22.02 172.85,21.55 ; U6.1@172.85,17.675 172.85,21.55
Net-(U2-VOUT): C5.1@168.05,17.95 U2.5@172.475,22.395 U6.1@172.85,17.675 | length 11.9
  F.Cu w0.254: C5.1@168.05,17.95 168.05,19.2 169.6,20.75 172.05,20.75 172.85,21.55 ; U2.5@172.475,22.395 172.85,22.02 172.85,21.55 ; U6.1@172.85,17.675 172.85,21.55
Net-(U4A-+): C6.2@131.55,29.15 R11.2@131.587,26.65 U1.7@129,26.92 U4.3@139.25,27.515 | length 16.2
  F.Cu w0.254: U1.7@129,26.92 131.317,26.92 131.587,26.65 131.55,26.687 131.55,29.15 131.55,29.2 133.05,30.7 134.2,30.7 134.75,30.15 134.75,27.95 135.185,27.515 U4.3@139.25,27.515
Net-(U4A-+): C6.2@131.55,29.15 R11.2@131.587,26.65 U1.7@129,26.92 U4.3@139.25,27.515 | length 16.2
  F.Cu w0.254: U1.7@129,26.92 131.317,26.92 131.587,26.65 131.55,26.687 131.55,29.15 131.55,29.2 133.05,30.7 134.2,30.7 134.75,30.15 134.75,27.95 135.185,27.515 U4.3@139.25,27.515
Net-(U4B--): R16.1@149.425,27.55 U4.6@146.25,27.515 | length 3.2
  F.Cu w0.254: U4.6@146.25,27.515 149.39,27.515 R16.1@149.425,27.55
Net-(U4B--): R16.1@149.425,27.55 U4.6@146.25,27.515 | length 3.2
  F.Cu w0.254: U4.6@146.25,27.515 149.39,27.515 R16.1@149.425,27.55
Net-(U5A--): R21.2@142.913,21.15 R22.1@141.088,18.65 U5.2@139.25,13.535 | length 10.4
  F.Cu w0.254: U5.2@139.25,13.535 138.865,13.535 137.97,14.43 137.97,15.532 141.088,18.65 142.913,20.475 R21.2@142.913,21.15
Net-(U5A--): R21.2@142.913,21.15 R22.1@141.088,18.65 U5.2@139.25,13.535 | length 10.4
  F.Cu w0.254: U5.2@139.25,13.535 138.865,13.535 137.97,14.43 137.97,15.532 141.088,18.65 142.913,20.475 R21.2@142.913,21.15
Net-(U5B--): C8.1@157.2,8.9 R24.1@148.75,11.237 R25.1@157.25,10.9 U5.6@146.25,12.265 U7.1@156.225,18.495 | length 24.8
  F.Cu w0.254: U5.6@146.25,12.265 147.723,12.265 148.75,11.237 148.75,9.35 150.5,7.6 155.9,7.6 156.95,8.65 C8.1@157.2,8.65 ; U7.1@156.225,18.495 157.63,17.09 157.63,11.28 157.25,10.9 157.2,10.85 C8.1@157.2,8.9
Net-(U5B--): C8.1@157.2,8.9 R24.1@148.75,11.237 R25.1@157.25,10.9 U5.6@146.25,12.265 U7.1@156.225,18.495 | length 24.8
  F.Cu w0.254: U5.6@146.25,12.265 147.723,12.265 148.75,11.237 148.75,9.35 150.5,7.6 155.9,7.6 156.95,8.65 C8.1@157.2,8.65 ; U7.1@156.225,18.495 157.63,17.09 157.63,11.28 157.25,10.9 157.2,10.85 C8.1@157.2,8.9
Net-(U6-FB): R12.2@171.037,10.15 R13.1@168.775,10.15 R15.2@171.037,12.65 U6.4@170.95,15.4 | length 7.3
  F.Cu w0.406: R13.1@168.775,10.15 R12.2@171.037,10.15 ; U6.4@170.95,15.15 170.95,12.737 R15.2@171.037,12.65
  F.Cu w0.61: R12.2@171.037,10.15 R15.2@171.037,12.65
Net-(U6-FB): R12.2@171.037,10.15 R13.1@168.775,10.15 R15.2@171.037,12.65 U6.4@170.95,15.4 | length 7.3
  F.Cu w0.406: R13.1@168.775,10.15 R12.2@171.037,10.15 ; U6.4@170.95,15.15 170.95,12.737 R15.2@171.037,12.65
  F.Cu w0.61: R12.2@171.037,10.15 R15.2@171.037,12.65
Net-(U7B-GND): R8.2@158.425,18.4 R9.1@158.5,20.65 U7.3@156.225,21.035 | length 4.7
  F.Cu w0.254: U7.3@156.225,21.035 156.61,20.65 158.5,20.65 158.5,18.475 R8.2@158.425,18.4
Net-(U7B-GND): R8.2@158.425,18.4 R9.1@158.5,20.65 U7.3@156.225,21.035 | length 4.7
  F.Cu w0.254: U7.3@156.225,21.035 156.61,20.65 158.5,20.65 158.5,18.475 R8.2@158.425,18.4
Net-(U7B-VL): R14.2@148.913,23.65 U7.5@151.275,22.305 | length 2.9
  F.Cu w0.254: R14.2@148.913,23.65 150.257,22.305 U7.5@151.275,22.305
Net-(U7B-VL): R14.2@148.913,23.65 U7.5@151.275,22.305 | length 2.9
  F.Cu w0.254: R14.2@148.913,23.65 150.257,22.305 U7.5@151.275,22.305
Out: C8.2@155.3,8.9 J3.1@151.5,9.65 RV3.2@153.3,14.65 U5.7@146.25,13.535 | length 17.6
  F.Cu w0.254: U5.7@146.25,13.535 146.865,14.15 152.85,14.15 153.6,14.9 153.6,10.1 ; J3.1@151.5,9.15 152.45,10.1 153.6,10.1 ; C8.2@155.3,8.4 153.6,10.1
Out: C8.2@155.3,8.9 J3.1@151.5,9.65 RV3.2@153.3,14.65 U5.7@146.25,13.535 | length 17.6
  F.Cu w0.254: U5.7@146.25,13.535 146.865,14.15 152.85,14.15 153.6,14.9 153.6,10.1 ; J3.1@151.5,9.15 152.45,10.1 153.6,10.1 ; C8.2@155.3,8.4 153.6,10.1
unconnected-(RV1-Pad3): RV1.3@117.75,8.9
unconnected-(RV1-Pad3): RV1.3@117.75,8.9
unconnected-(RV2-Pad3): RV2.3@129.5,7.65
unconnected-(RV2-Pad3): RV2.3@129.5,7.65
unconnected-(RV3-Pad3): RV3.3@156.2,15.9
unconnected-(RV3-Pad3): RV3.3@156.2,15.9
unconnected-(U2-LV-Pad6): U2.6@172.475,23.665
unconnected-(U2-LV-Pad6): U2.6@172.475,23.665
unconnected-(U2-NC-Pad1): U2.1@167.525,26.205
unconnected-(U2-NC-Pad1): U2.1@167.525,26.205
unconnected-(U2-OSC-Pad7): U2.7@172.475,24.935
unconnected-(U2-OSC-Pad7): U2.7@172.475,24.935
unconnected-(U3-BP-Pad4): U3.4@170.262,30.1
unconnected-(U3-BP-Pad4): U3.4@170.262,30.1
unconnected-(U3-EN-Pad3): U3.3@172.538,30.1
unconnected-(U3-EN-Pad3): U3.3@172.538,30.1
unconnected-(U6-EN-Pad3): U6.3@170.95,17.675
unconnected-(U6-EN-Pad3): U6.3@170.95,17.675
unconnected-(U7-Pad2): U7.2@156.225,19.765
unconnected-(U7-Pad2): U7.2@156.225,19.765
X_in: J1.1@143.9,33.1 U4.2@139.25,28.785 | length 9.5
  F.Cu w0.254: U4.2@139.25,28.785 138.891,28.785 137.97,29.706 137.97,30.42 140.75,33.2 J1.1@143.9,33.2
X_in: J1.1@143.9,33.1 U4.2@139.25,28.785 | length 9.5
  F.Cu w0.254: U4.2@139.25,28.785 138.891,28.785 137.97,29.706 137.97,30.42 140.75,33.2 J1.1@143.9,33.2
Y_in: J2.1@150.25,33 U4.5@146.25,26.245 | length 10.7
  F.Cu w0.254: U4.5@146.25,26.245 149.795,26.245 150.3,26.75 J2.1@150.3,33.2
Y_in: J2.1@150.25,33 U4.5@146.25,26.245 | length 10.7
  F.Cu w0.254: U4.5@146.25,26.245 149.795,26.245 150.3,26.75 J2.1@150.3,33.2

## Polygon pours and split planes (outlines as drawn)
GND on F.Cu "F.Cu-GND-1" (solid, remove dead copper, pour order 2): 115.25,34.9 115.25,5.4 174.75,5.4 174.75,34.9
GND on F.Cu "F.Cu-GND" (solid, remove dead copper, pour order 7): 174.75,34.9 115.25,34.9 115.25,5.4 174.75,5.4
GND on F.Cu "F.Cu-GND-1" (solid, remove dead copper, pour order 6): 115.25,34.9 115.25,5.4 174.75,5.4 174.75,34.9
GND on F.Cu "F.Cu-GND" (solid, remove dead copper, pour order 3): 174.75,34.9 115.25,34.9 115.25,5.4 174.75,5.4
GND on B.Cu "B.Cu-GND-1" (solid, remove dead copper, pour order 2): 115.25,34.9 115.25,5.4 174.75,5.4 174.75,34.9
GND on B.Cu "B.Cu-GND" (solid, remove dead copper, pour order 8): 174.75,34.9 115.25,34.9 115.25,5.4 174.75,5.4
GND on B.Cu "B.Cu-GND-1" (solid, remove dead copper, pour order 5): 115.25,34.9 115.25,5.4 174.75,5.4 174.75,34.9
GND on B.Cu "B.Cu-GND" (solid, remove dead copper, pour order 4): 174.75,34.9 115.25,34.9 115.25,5.4 174.75,5.4

## Keep-outs
Edge.Cuts:
  lines w0: 115,5.15 115,35.15 ; 115,5.15 175,5.15 ; 115,5.15 115,35.15 ; 115,5.15 175,5.15 ; 115,35.15 175,35.15 ; 115,35.15 175,35.15 ; 175,5.15 175,35.15 ; 175,5.15 175,35.15
  lines w0.254: 115,5.15 115,35.15 ; 115,5.15 175,5.15 ; 115,5.15 115,35.15 ; 115,5.15 175,5.15 ; 115,35.15 175,35.15 ; 115,35.15 175,35.15 ; 175,5.15 175,35.15 ; 175,5.15 175,35.15

## Dimensions
115,35.15 to 175,35.15 on Eco1.User
175,5.15 to 175,35.15 on Eco1.User
115,35.15 to 175,35.15 on Eco1.User
175,5.15 to 175,35.15 on Eco1.User